# Altium PCB HandBox-KCTW.PcbDoc
Units mm, origin at the board's own origin, x right, y up, seen from the top; angles counter-clockwise.
Board outline 36 x 36 mm, 2 copper layers (Top Layer, Bottom Layer); 3 components, 3 nets, 13 pads, 8 vias.
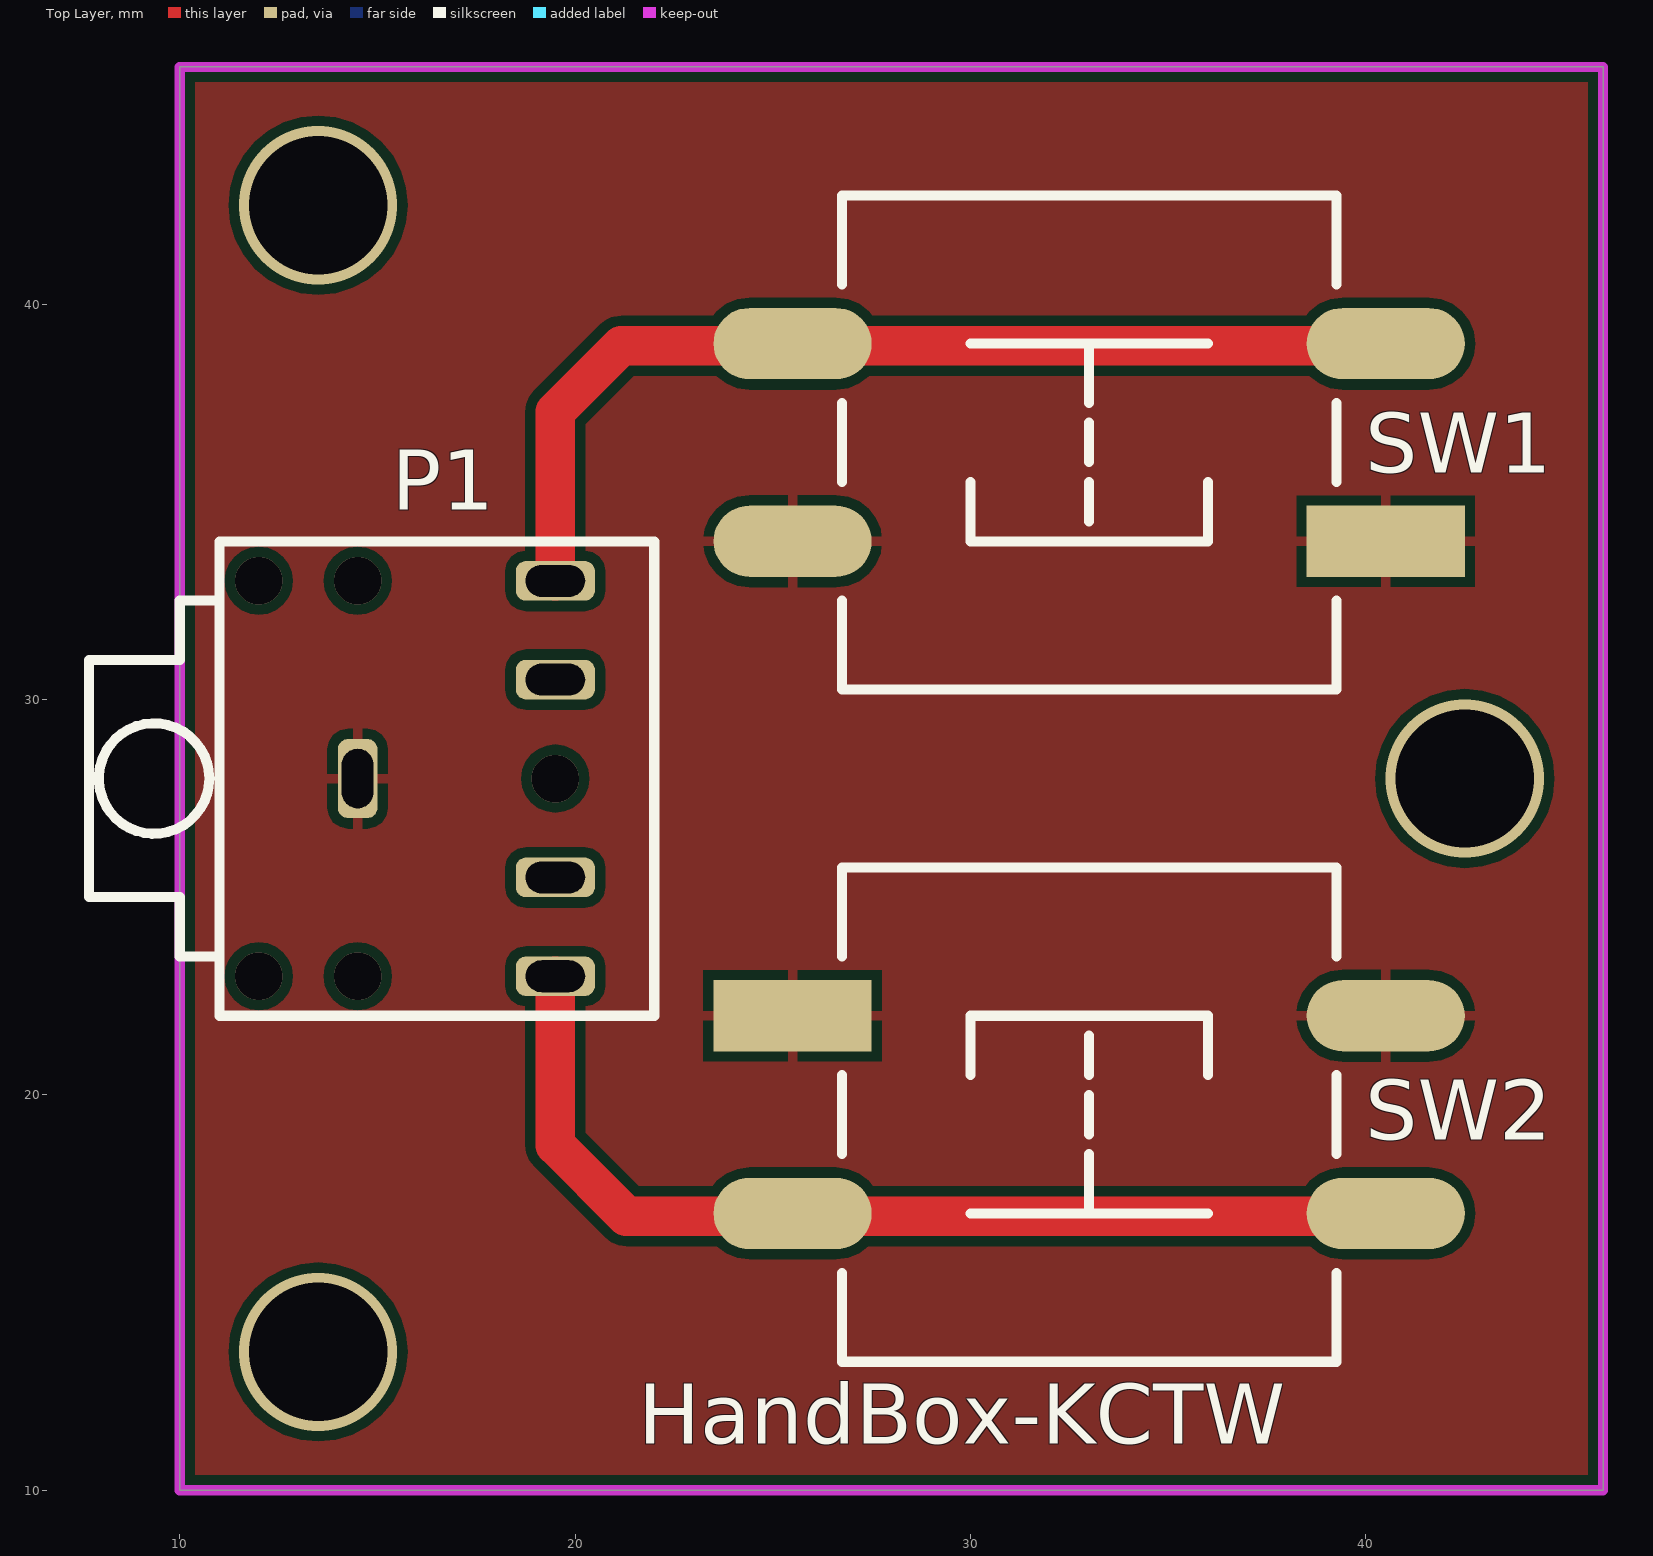
[diagram p0: Top Layer view]
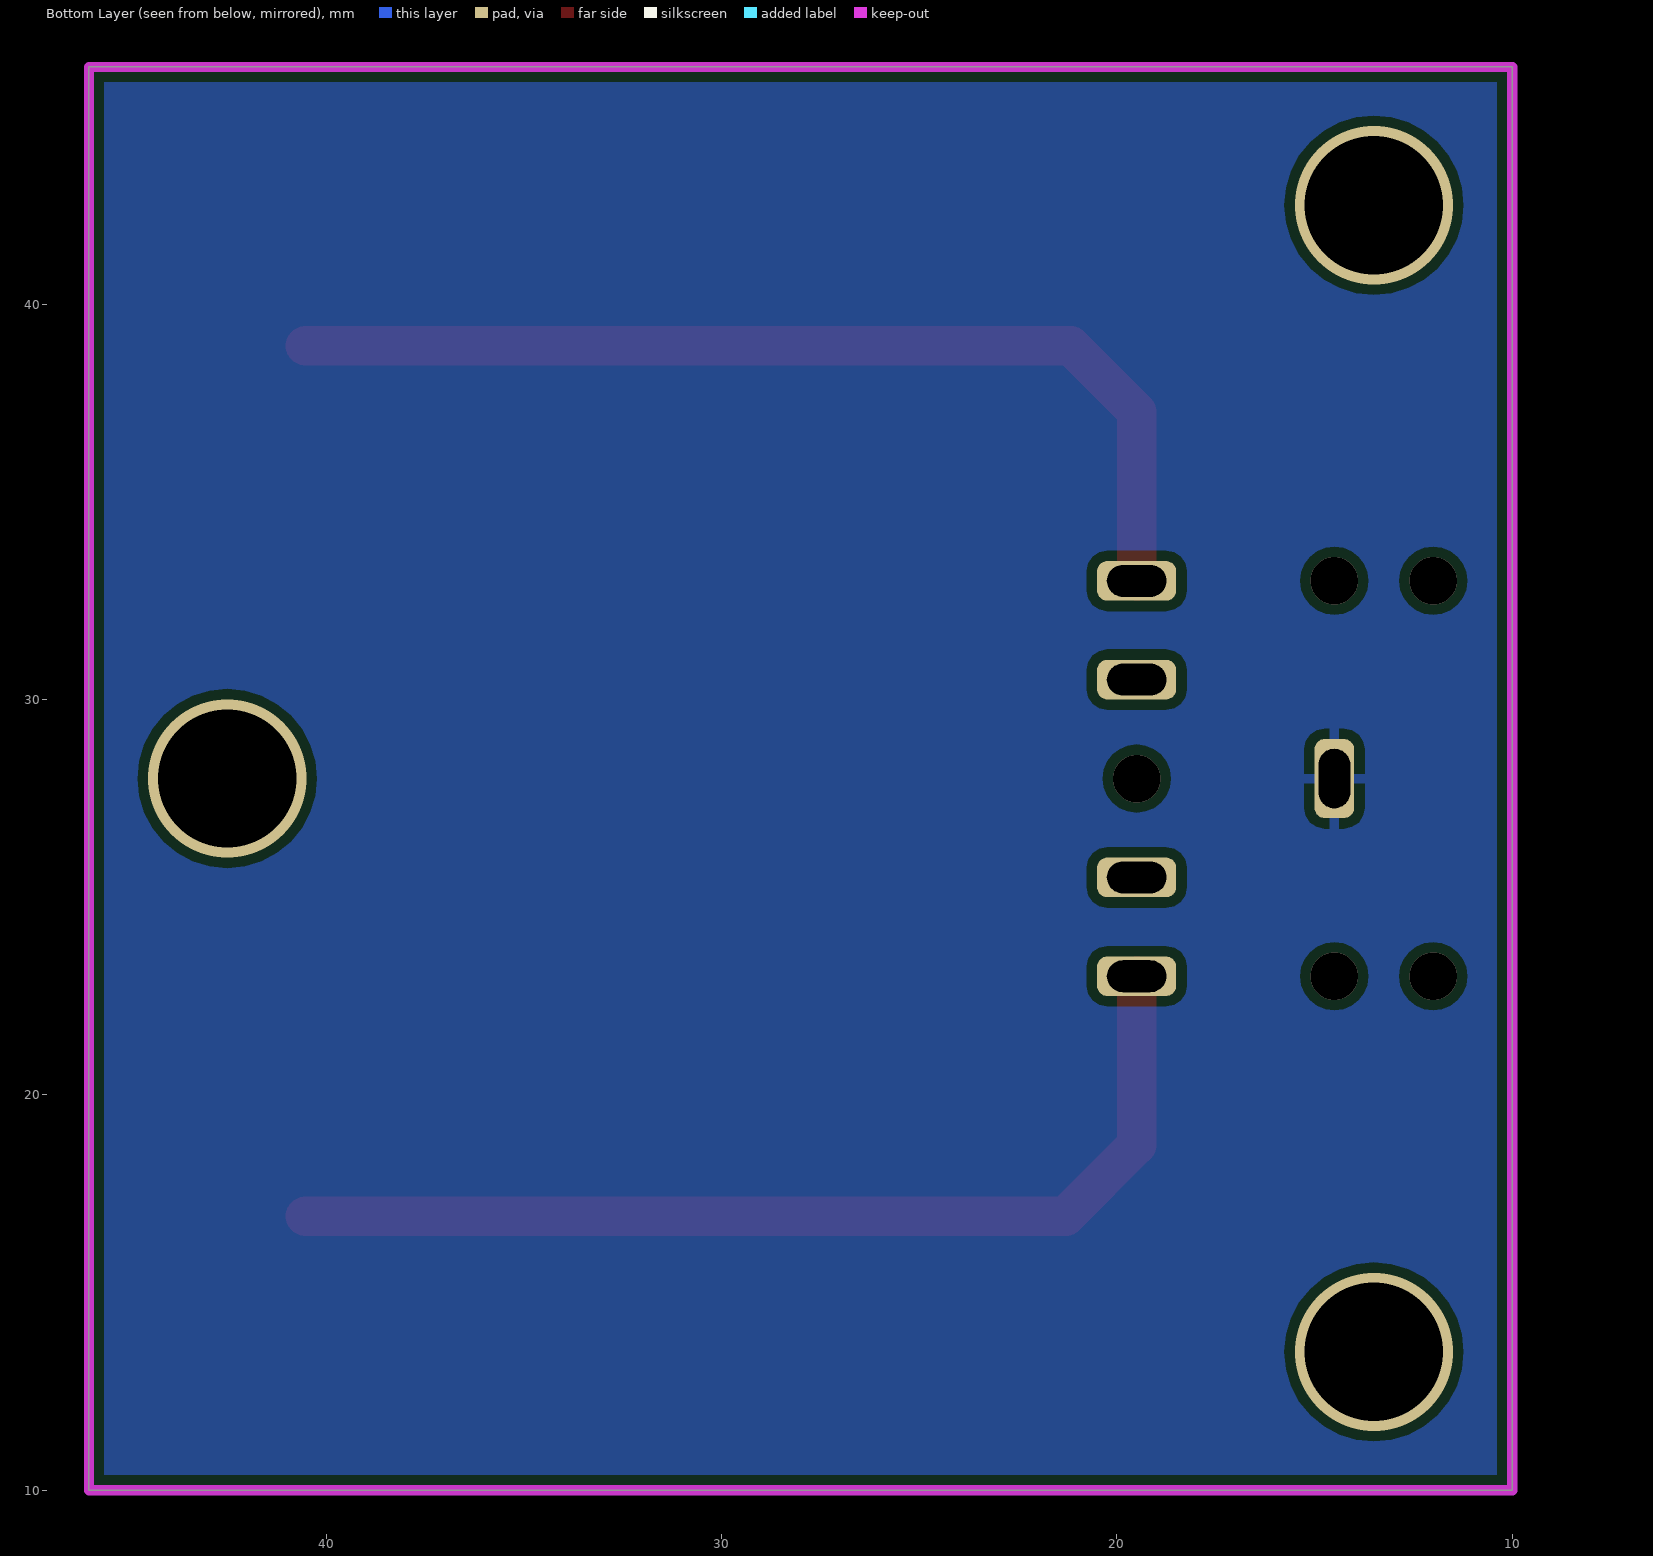
[diagram p1: Bottom Layer view, seen from below]

## Layer stack, top to bottom
Top Solder: solder mask 0.0102, Solder Resist, Dk 3.5
Top Layer: signal copper 0.0356
Dielectric 1: dielectric 0.32, FR-4, Dk 4.8
Bottom Layer: signal copper 0.0356
Bottom Solder: solder mask 0.0102, Solder Resist, Dk 3.5

## Board outline
10,10 10,46 46,46 46,10

## Design rules (kind name [scope] priority, off if disabled: settings)
Clearance [All] p1: gap=0.254
PolygonConnect [All] p1: connectstyle=Relief reliefconductorwidth=0.254 reliefentries=4 polygonreliefangle="90 Angle" airgapwidth=0.254
RoutingVias [All] p1: holewidth=0.711 width=1.27 viastyle="Through Hole" minholewidth=0.711 minwidth=1.27 maxholewidth=0.711 maxwidth=1.27
SolderMaskExpansion [All] p1: expansion=0.102
Width [All] p1: maxlimit=1.27 minlimit=0.254 preferedwidth=0.254
29 further rules are at their usual default settings.

## Components (designator, comment, footprint, x,y, rotation, side; value= is the part's Value field where it differs from the comment)
P1 "3F07" 3F07 11,23.5 r0 top locked
SW1 "6x6x5" "TSW SMD-12*12*8" 33,36.5 r180 top
SW2 "6x6x5" "TSW SMD-12*12*8" 33,19.5 r0 top

## Footprints (in the part's own frame and the unit in brackets; to place one, negate y for a bottom-side part, rotate by r counter-clockwise, add the part's x,y. Pads: shape width x height; smd on the part's side, far side on the other; paste and mask are expansions set on the pad)
3F07 [mm] "EarPhone3.5"
  rrect50% 1x2 hole 0.8 slot 1.5 at 90 deg: 1(3.5,4.5)
  rrect50% 2x1 hole 0.8 slot 1.5 at 0 deg: 2(8.5,9.5) 3(8.5,7) 4(8.5,2) 5(8.5,-0.5)
  silkscreen extent -3.3,-1.5 11,10.5
"TSW SMD-12*12*8" [mm] "12*12*8mm"
  rect 4x1.8 smd: 1(-7.5,2.5)
  oval 4x1.8 smd: 2(-7.5,-2.5) 3(7.5,-2.5) 4(7.5,2.5)
  silkscreen extent -6.25,-6.25 6.25,6.25, body extent -7.6,-6 7.6,6, height 8.15

## Part data
P1: "EarPhone3.5"
SW1 SW2: library part "TSW SMD-6x6", "贴片6x6轻触开关"

## Via types
v1: diameter 1.2, hole 1.2, Top Layer to Bottom Layer, 5 vias
v2: diameter 4, hole 3.5, Top Layer to Bottom Layer, 3 vias

## Nets (pads, with @x,y where several pads share a name; then routed paths per layer and width w, separated by ;. In a path a pad name is that pad's centre, name@x,y a point inside that pad or via, vN(x,y) a via of type N, cw(c..) or ccw(c..) an arc to the next point about the centre after c; other vN are vias at no path point)
DOWN: P1.2 SW1.2 SW1.3 | length 26
  Top Layer w1: P1.2 19.5,37.28 21.169,38.949 SW1.2@40.52,38.949
GND: P1.1 SW1.1 SW1.4 SW2.1 SW2.4
UP: P1.5 SW2.2 SW2.3 | length 26
  Top Layer w1: P1.5 19.5,18.727 21.296,16.931 SW2.3@40.52,16.931
pads on no net: P1.3 P1.4
copper on no net:
  other v1: 12,23 14.5,23 19.5,28 12,33 14.5,33
  other v2: 13.5,13.5 42.5,28 13.5,42.5

## Polygon pours and split planes (outlines as drawn)
GND on Top Layer "Bottom Layer-No Net" (solid, remove dead copper, pour order 5): 10,10 10,46 46,46 46,10
GND on Bottom Layer "Bottom Layer-No Net" (solid, remove dead copper, pour order 7): 10,10 46,10 46,46 10,46

## Keep-outs
Keep-Out Layer:
  the board outline again, w0.254

## Silkscreen, mask and mechanical layers (free items; w line width, h text height)
Top Overlay:
  text "HandBox-KCTW" at 21.59,11.176 h1.52